# EAGLE board Clock_version_2.2 (EAGLE 9.6.2)
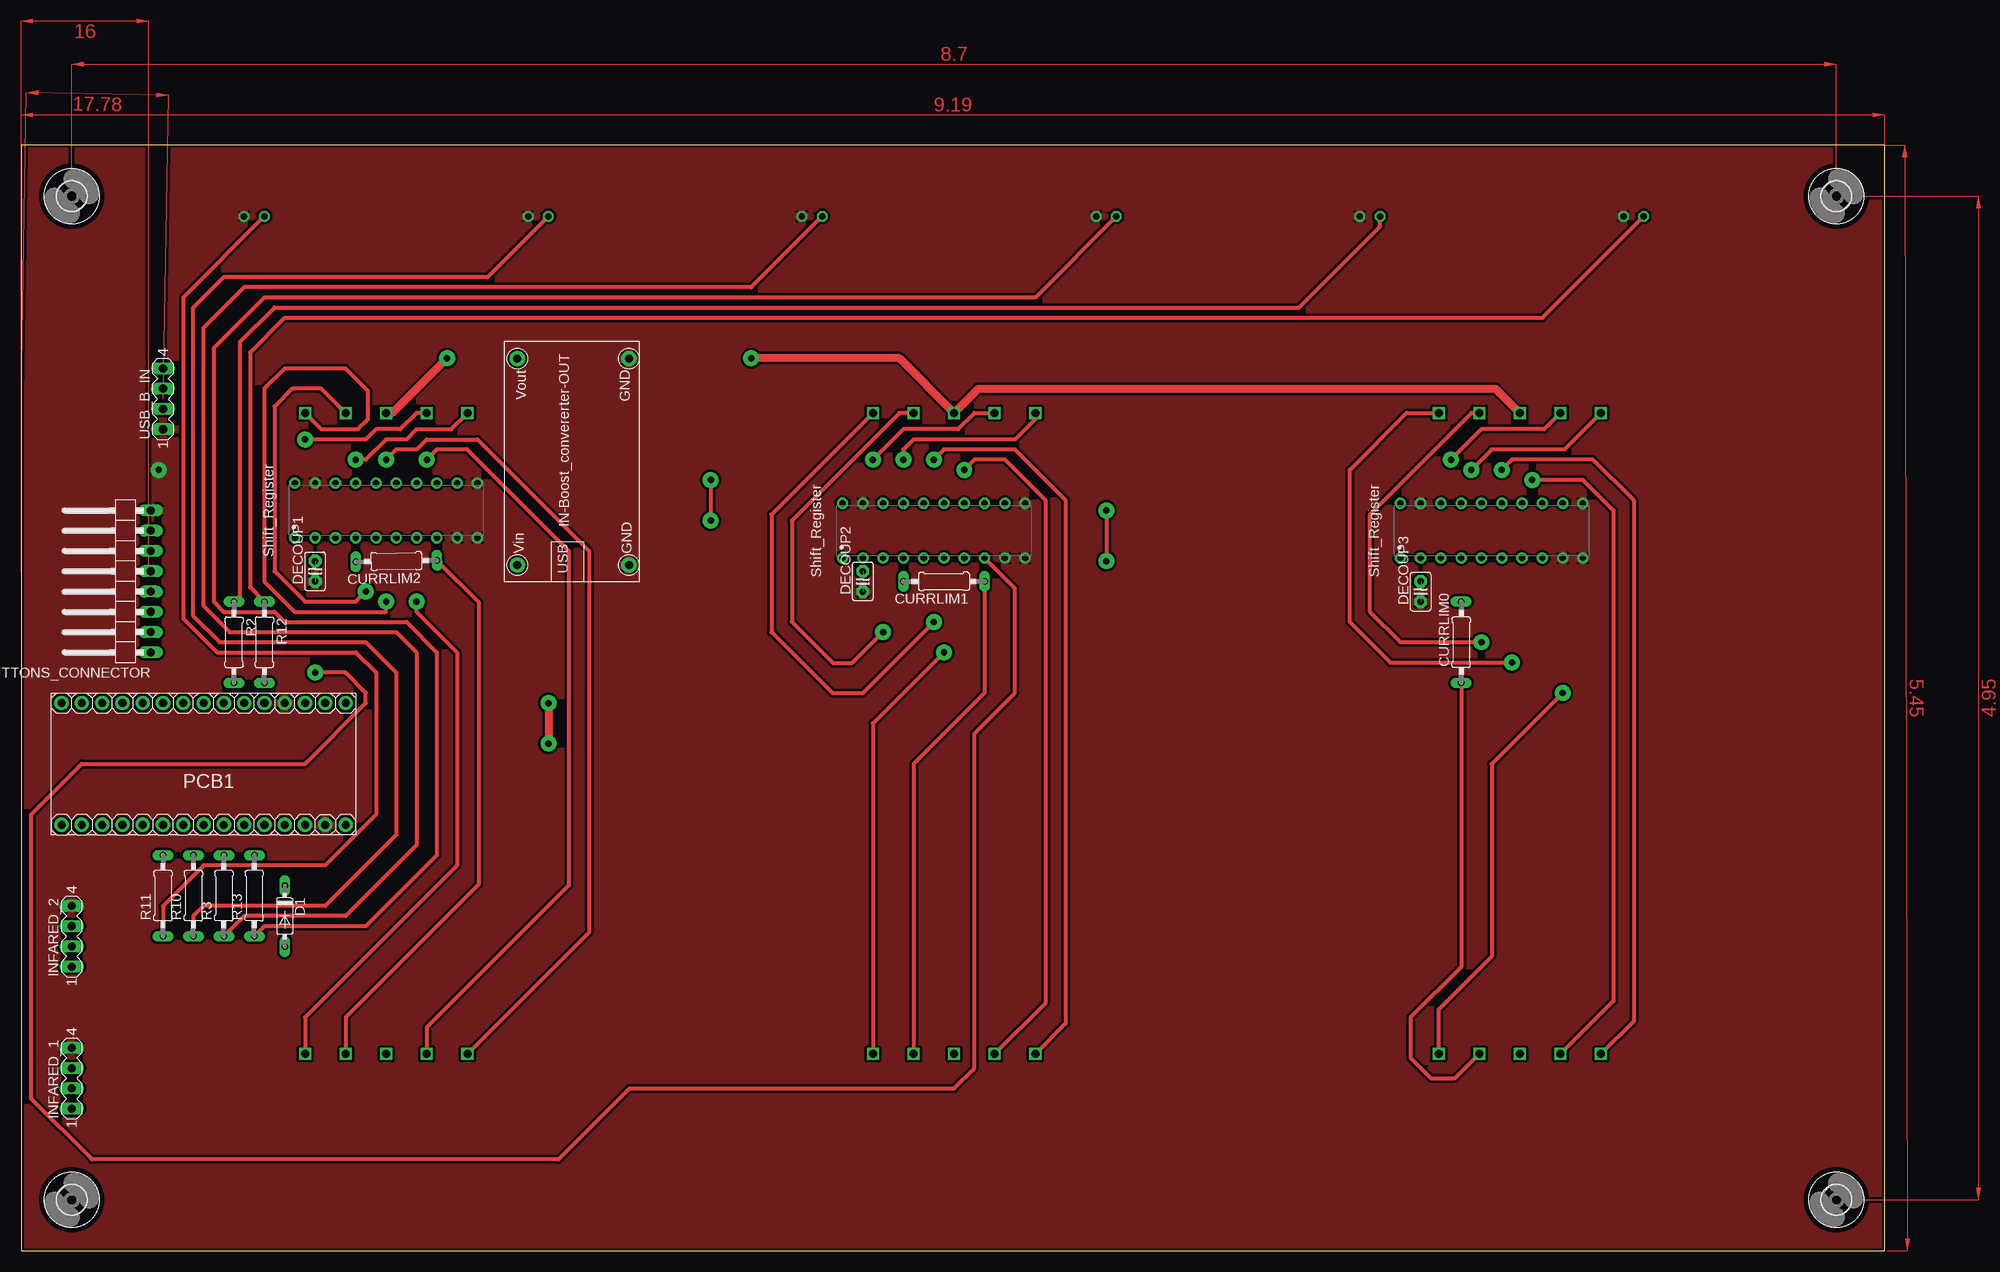
[diagram p0: board, top side]
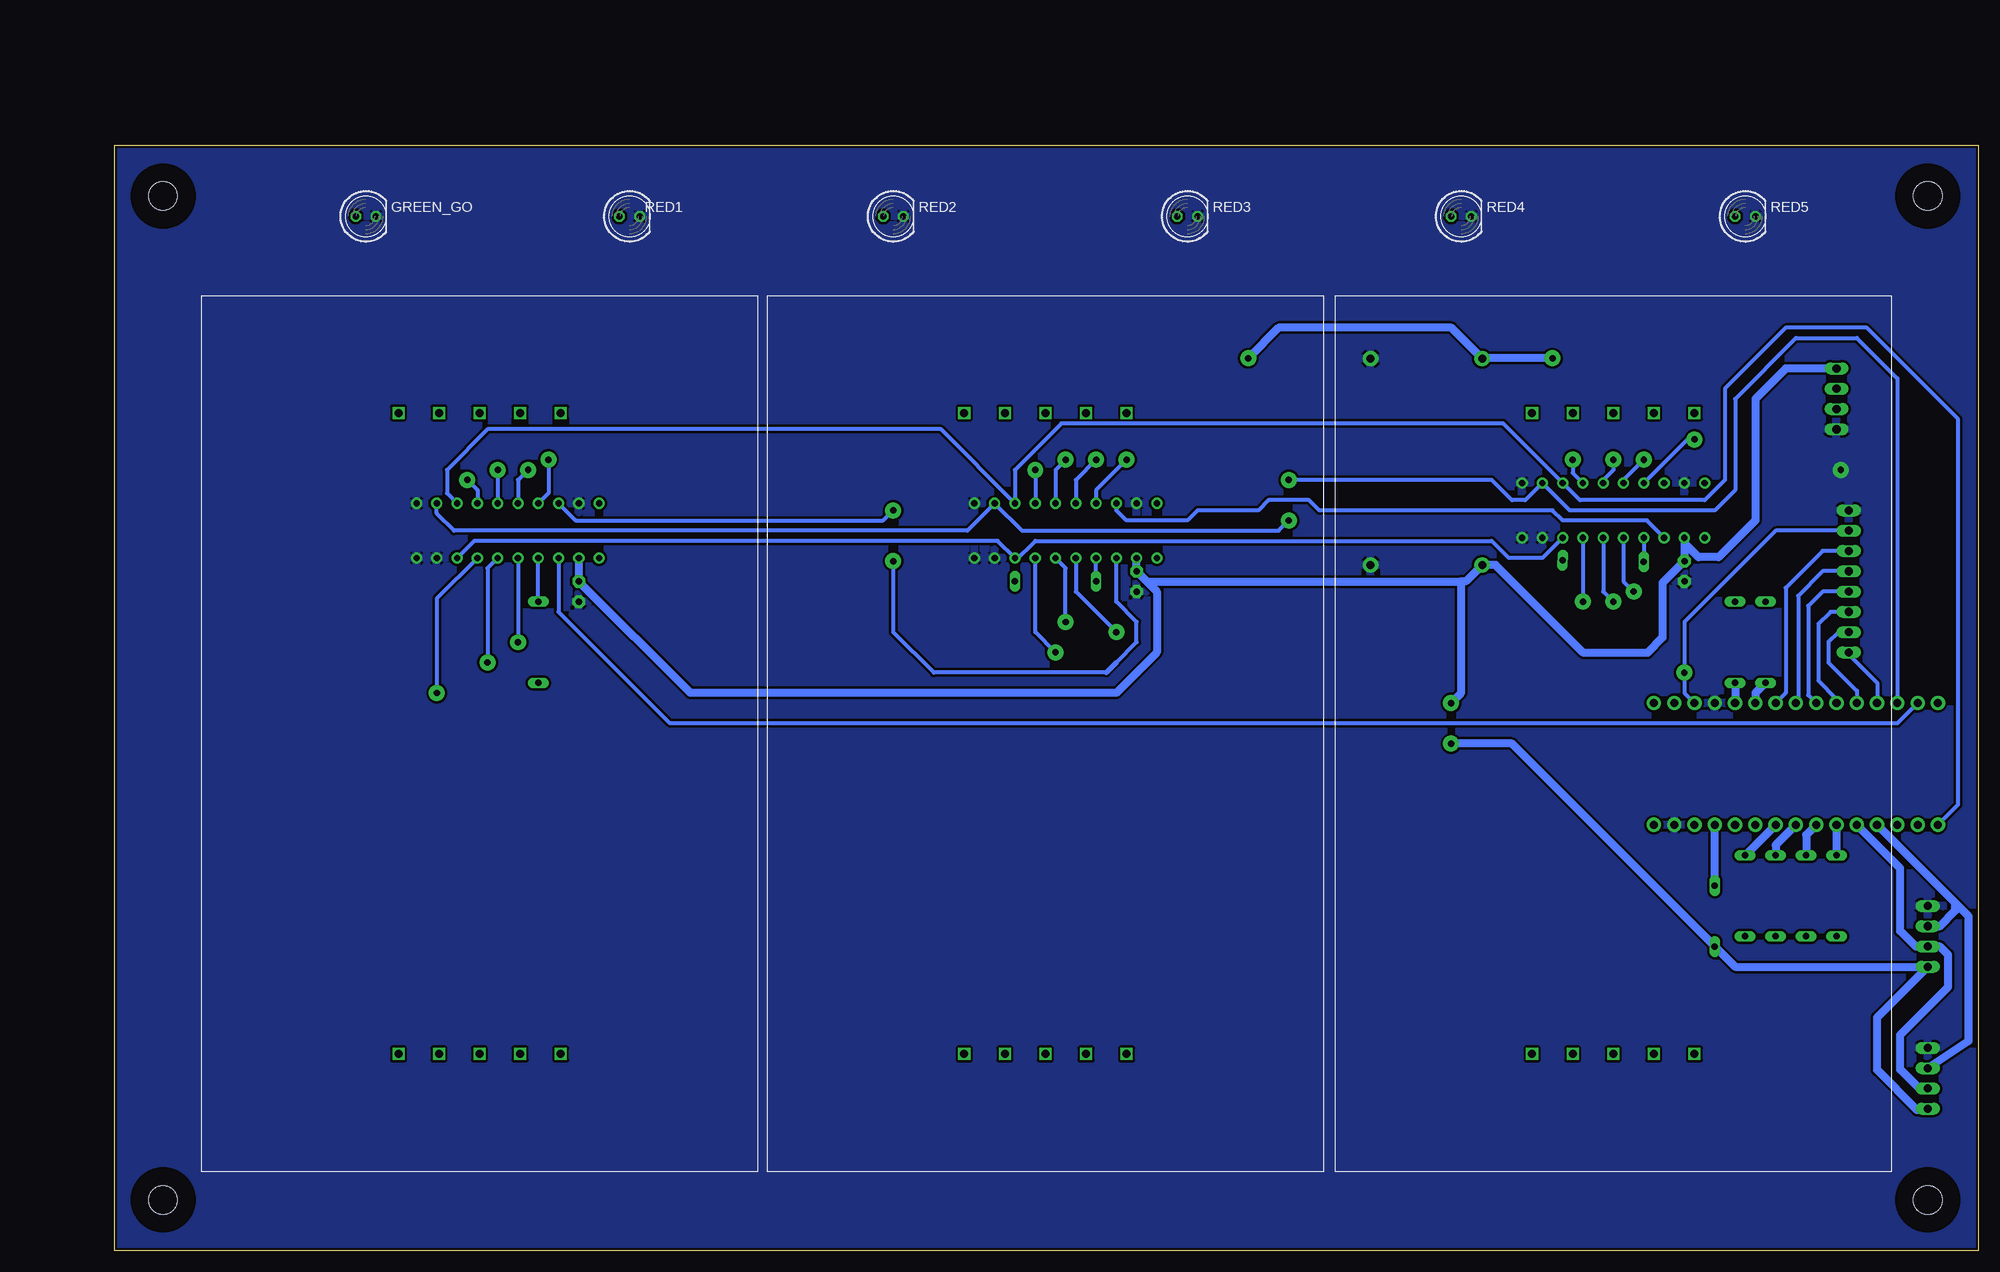
[diagram p1: board, bottom side, seen from below]

Size 233.35 x 138.42 mm. Coordinates in mm from the lower left corner, seen from the top.
Outline: 0,0 233.35,0 233.35,138.42 0,138.42 0,0
Copper layers (1*16): Top 0.035mm / dielectric 1.5mm / Bottom 0.035mm
Design rules "DRC_Advanced *": minimum track width 12mil, minimum drill 0.3mm, track to track 12mil, track to pad 12mil, pad to pad 12mil, via to via 12mil, smd to smd 6mil, copper to edge 12mil, drill to drill 12mil, minimum pad ring 10mil, minimum via ring 8mil, stop-mask expansion 4mil, vias tented up to drill 0mil, thermal gap 12mil

## Footprints (pad centres in the part's own frame; a part is rotated, then mirrored left to right if it is on the bottom)
1X08/90 = drill 1.016 long: 1 -8.89,-3.81; 2 -6.35,-3.81; 3 -3.81,-3.81; 4 -1.27,-3.81; 5 1.27,-3.81; 6 3.81,-3.81; 7 6.35,-3.81; 8 8.89,-3.81
0207/10 = drill 0.813 long: 1 -5.08,0; 2 5.08,0
DO35-7 = drill 0.813 long: A 3.81,0; C -3.81,0
C2.5-2 = drill 0.813 pad 1.6 octagon: 1 -1.27,0; 2 1.27,0
LED5MM = drill 0.813 octagon: A -1.27,0; K 1.27,0
MA04-1 = drill 1.016 long: 1 -3.81,0; 2 -1.27,0; 3 1.27,0; 4 3.81,0
7SEG_LED = drill 1 square: A 5.08,40.132; B 10.16,40.132; C 10.16,-40.132; CA 0,40.132; COM 0,-40.132; D -5.08,-40.132; DP 5.08,-40.132; E -10.16,-40.132; F -10.16,40.132; G -5.08,40.132
ARDUINO_NANO_SMOL = drill 1.016 pad 1.778: 3V3 -13.97,-7.62; 5V 11.43,-7.62; A0 -8.89,-7.62; A1 -6.35,-7.62; A2 -3.81,-7.62; A3 -1.27,-7.62; A4 1.27,-7.62; A5 3.81,-7.62; A6 6.35,-7.62; A7 8.89,-7.62; D2 8.89,7.62; D3 6.35,7.62; D4 3.81,7.62; D5 1.27,7.62; D6 -1.27,7.62; D7 -3.81,7.62; D8 -6.35,7.62; D9 -8.89,7.62; D10 -11.43,7.62; D11 -13.97,7.62; D12 -16.51,7.62; D13 -16.51,-7.62; GND 11.43,7.62; GND@2 16.51,-7.62; REF -11.43,-7.62; RESET 13.97,7.62; RESET@2 13.97,-7.62; RX0 16.51,7.62; TX1 19.05,7.62; VIN 19.05,-7.62
SHIFT_REGISTER = drill 0.788 pad 1.388: 1 -3.429,11.43; 2 -3.429,8.89; 3 -3.429,6.35; 4 -3.429,3.81; 5 -3.429,1.27; 6 -3.429,-1.27; 7 -3.429,-3.81; 8 -3.429,-6.35; 9 -3.429,-8.89; 10 -3.429,-11.43; 11 3.429,-11.43; 12 3.429,-8.89; 13 3.429,-6.35; 14 3.429,-3.81; 15 3.429,-1.27; 16 3.429,1.27; 17 3.429,3.81; 18 3.429,6.35; 19 3.429,8.89; 20 3.429,11.43
3,6 = hole 3.6: 0,0
BOOST_CONV = drill 1 pad 1.93: P$1 2.05,1.35; P$2 2.05,15.32; P$3 27.9,15.32; P$4 27.9,1.35

## Placement (x,y rotation side)
BUTTONS_CONNECTOR  [1X08/90]  12.43,83.82 90 top
CURRLIM0  270  [0207/10]  180.34,76.2 90 top
CURRLIM1  270  [0207/10]  115.57,83.82 180 top
CURRLIM2  270  [0207/10]  46.99,86.36 181 top
D1  1N4148DO35-7  [DO35-7]  33.02,41.91 270 top
DECOUP1  0.1uF  [C2.5-2]  36.83,85.09 90 top
DECOUP2  0.1uF  [C2.5-2]  105.41,83.82 90 top
DECOUP3  0.1uF  [C2.5-2]  175.26,82.55 90 top
GREEN_GO  [LED5MM]  201.93,129.54 0 bottom
INFARED_1  [MA04-1]  6.35,21.59 90 top
INFARED_2  [MA04-1]  6.35,39.37 90 top
MINUTES  7SEG_LED_A-3001SR  [7SEG_LED]  187.69,64.77 0 bottom
PCB1  ARDUINO_NANO_NOI2CSMOL  [ARDUINO_NANO_SMOL]  21.59,60.96 0 top
R2  270  [0207/10]  26.67,76.2 270 top
R3  270  [0207/10]  25.4,44.45 90 top
R10  270  [0207/10]  21.59,44.45 90 top
R11  270  [0207/10]  17.78,44.45 90 top
R12  270  [0207/10]  30.48,76.2 270 top
R13  270  [0207/10]  29.21,44.45 90 top
RED1  [LED5MM]  168.91,129.54 0 bottom
RED2  [LED5MM]  135.89,129.54 0 bottom
RED3  [LED5MM]  99.06,129.54 0 bottom
RED4  [LED5MM]  64.77,129.54 0 bottom
RED5  [LED5MM]  29.21,129.54 0 bottom
SECONDS_ONES  7SEG_LED_A-3001SR  [7SEG_LED]  45.74,64.77 0 bottom
SECONDS_TENS  7SEG_LED_A-3001SR  [7SEG_LED]  116.84,64.77 0 bottom
SP0  SHIFT_REGISTER_TPIC6C595  [SHIFT_REGISTER]  184.15,90.17 90 top
SP1  SHIFT_REGISTER_TPIC6C595  [SHIFT_REGISTER]  114.3,90.17 90 top
SP2  SHIFT_REGISTER_TPIC6C595  [SHIFT_REGISTER]  45.72,92.71 90 top
U$1  [3,6]  6.35,132.08 0 top
U$4  BOOST_CONV  [BOOST_CONV]  77.47,83.82 90 top
U$6  [3,6]  6.35,6.35 0 top
U$7  [3,6]  227.33,132.08 0 top
U$8  [3,6]  227.33,6.35 0 top
USB_B_IN  [MA04-1]  17.78,106.68 90 top

## Library data of the parts
BUTTONS_CONNECTOR = pinhead
CURRLIM0 CURRLIM1 CURRLIM2 R2 R3 R10-R13 = BJH_LIB; SPICEPREFIX: R
D1 = diode
DECOUP1-DECOUP3 = capacitor-wima
GREEN_GO RED1-RED5 = led
INFARED_1 INFARED_2 USB_B_IN = con-lstb; OC_FARNELL: unknown; OC_NEWARK: unknown
MINUTES SECONDS_ONES SECONDS_TENS SP0 SP1 SP2 = ARC_Clock
PCB1 = ElcPartsLibrary
U$1 U$6-U$8 = holes
U$4 = BJH_LIB

## Nets
1MIN_IN: BUTTONS_CONNECTOR.2 PCB1.D8
5V: D1.A DECOUP1.2 DECOUP2.2 DECOUP3.2 INFARED_1.1 INFARED_2.1 SP0.2 SP1.2 SP2.2 U$4.P$2 USB_B_IN.4
12V: MINUTES.CA SECONDS_ONES.CA SECONDS_TENS.CA U$4.P$3
30S_IN: BUTTONS_CONNECTOR.3 PCB1.D7
A0: MINUTES.A SP0.5
A1: SECONDS_TENS.A SP1.5
A2: SECONDS_ONES.A SP2.5
B0: MINUTES.B SP0.6
B1: SECONDS_TENS.B SP1.6
B2: SECONDS_ONES.B SP2.6
C0: MINUTES.C SP0.7
C1: SECONDS_TENS.C SP1.7
C2: SECONDS_ONES.C SP2.7
D0: MINUTES.D SP0.14
D1: SECONDS_TENS.D SP1.14
D2: SECONDS_ONES.D SP2.14
D+: USB_B_IN.2
D-: USB_B_IN.3
DP0: CURRLIM0.2 SP0.4
DP1: CURRLIM1.2 SP1.4
DP2: CURRLIM2.2 SP2.4
E0: MINUTES.E SP0.15
E1: SECONDS_TENS.E SP1.15
E2: SECONDS_ONES.E SP2.15
F0: MINUTES.F SP0.16
F1: SECONDS_TENS.F SP1.16
F2: SECONDS_ONES.F SP2.16
G0: MINUTES.G SP0.17
G1: SECONDS_TENS.G SP1.17
G2: SECONDS_ONES.G SP2.17
GND: BUTTONS_CONNECTOR.8 DECOUP1.1 DECOUP2.1 DECOUP3.1 GREEN_GO.K INFARED_1.4 INFARED_2.4 PCB1.GND PCB1.GND@2 RED1.K RED2.K RED3.K RED4.K RED5.K SP0.9 SP0.10 SP0.11 SP0.19 SP1.9 SP1.10 SP1.11 SP1.19 SP2.9 SP2.10 SP2.11 SP2.19 U$4.P$1 U$4.P$4 USB_B_IN.1
GREEN: PCB1.D2 R12.2
IF_IN: INFARED_1.3 INFARED_2.3 PCB1.A0
IF_OUT: INFARED_1.2 INFARED_2.2 PCB1.A1
MISC: BUTTONS_CONNECTOR.1 PCB1.D9
N$1: PCB1.D11 SP0.3
N$2: D1.C PCB1.5V
N$3: CURRLIM0.1 MINUTES.DP
N$4: CURRLIM1.1 SECONDS_TENS.DP
N$5: CURRLIM2.1 SECONDS_ONES.DP
N$6: SP0.18 SP1.3
N$7: SP1.18 SP2.3
N$8: PCB1.D13 SP0.13 SP1.13 SP2.13
N$9: PCB1.RESET@2
N$11: R2.1 RED1.A
N$12: R13.1 RED2.A
N$13: R3.1 RED3.A
N$14: R10.1 RED4.A
N$15: R11.1 RED5.A
N$16: GREEN_GO.A R12.1
N$19: PCB1.A5 R13.2
N$20: PCB1.A4 R3.2
N$21: PCB1.A3 R10.2
N$22: PCB1.A2 R11.2
N$36: SECONDS_ONES.COM
N$40: SECONDS_TENS.COM
N$44: MINUTES.COM
PAUSE_IN: BUTTONS_CONNECTOR.5 PCB1.D5
REDONE: PCB1.D3 R2.2
RESUME_IN: BUTTONS_CONNECTOR.4 PCB1.D6
RST: BUTTONS_CONNECTOR.7 PCB1.RESET SP0.8 SP1.8 SP2.8
SS: PCB1.D10 SP0.12 SP1.12 SP2.12
START_IN: BUTTONS_CONNECTOR.6 PCB1.D4

## Tracks (layer width: path | path; a pad name or v marks a point on that pad's centre or on a via)
1MIN_IN
  Bottom 0.508: BUTTONS_CONNECTOR.2 17.51,77.47 18.78,76.2 18.78,73.66 15.24,70.12 PCB1.D8
5V  (via drill 0.8 pad 2)
  Top 1.016: v66.04,68.58 v66.04,63.5
  Bottom 1.016: 64.77,83.82 64.2,83.82 U$4.P$2 60.47,85.87 49.47,74.87 41.47,74.87 39.56,76.77 39.56,83.63 DECOUP1.2 SP2.2 36.83,88.64 35.06,86.86 32.52,86.86 27.94,91.44 27.94,106.68 24.13,110.49 USB_B_IN.4 | 64.77,83.82 104.14,83.82 DECOUP2.2 | DECOUP2.2 SP1.2 | SP0.2 DECOUP3.2 161.29,69.85 107.95,69.85 102.87,74.93 102.87,82.55 DECOUP2.2 | INFARED_1.1 6.5,17.63 7.7,17.63 12.7,22.63 12.7,29.21 INFARED_2.1 30.48,35.56 D1.A 58.42,63.5 v66.04,63.5 | v66.04,68.58 64.77,69.85 64.77,83.82
12V  (via drill 0.8 pad 2)
  Top 1.016: v53.34,111.76 46.48,104.9 SECONDS_ONES.CA | MINUTES.CA 184.64,107.95 119.89,107.95 SECONDS_TENS.CA 109.98,111.76 v91.44,111.76
  Bottom 1.016: v53.34,111.76 62.11,111.76 U$4.P$3 66,115.57 87.63,115.57 v91.44,111.76
30S_IN
  Bottom 0.508: BUTTONS_CONNECTOR.3 18.51,80.01 20.05,78.47 20.05,71.39 17.78,69.12 PCB1.D7
A0  (via drill 0.8 pad 2)
  Top 0.508: v182.88,76.2 172.72,76.2 168.91,80.01 168.91,92.2 181.61,104.9 MINUTES.A
  Bottom 0.508: SP0.5 v182.88,76.2
A1  (via drill 0.8 pad 2)
  Top 0.508: SECONDS_TENS.A 109.98,104.9 96.52,91.44 96.52,78.74 101.69,73.57 104.05,73.57 v107.95,77.47
  Bottom 0.508: SP1.5 113.03,82.55 v107.95,77.47
A2  (via drill 0.8 pad 2)
  Top 0.508: SECONDS_ONES.A 37.61,107.95 33.98,107.95 31.75,105.72 31.75,85.09 35.56,81.28 41.91,81.28 v43.18,82.55
  Bottom 0.508: SP2.5 44.45,83.82 v43.18,82.55
B0  (via drill 0.8 pad 2)
  Top 0.508: v186.69,73.66 171.45,73.66 166.37,78.74 166.37,97.79 173.48,104.9 MINUTES.B
  Bottom 0.508: SP0.6 186.69,85.47 v186.69,73.66
B1  (via drill 0.8 pad 2)
  Top 0.508: SECONDS_TENS.B 93.98,92.2 93.98,77.47 101.6,69.85 105.41,69.85 v114.3,78.74
  Bottom 0.508: v114.3,78.74 114.3,85.47 SP1.6
B2  (via drill 0.8 pad 2)
  Top 0.508: SECONDS_ONES.B 35.58,104.89 37.59,102.87 42.18,102.87 43.45,104.14 43.45,107.68 40.64,110.49 33.02,110.49 30.48,107.95 30.48,83.82 34.29,80.01 45.72,80.01 v45.72,81.28
  Bottom 0.508: SP2.6 46.99,82.55 v45.72,81.28
C0  (via drill 0.8 pad 2)
  Top 0.508: MINUTES.C 177.53,30.21 184.15,36.83 184.15,60.96 v193.04,69.85
  Bottom 0.508: SP0.7 193.04,81.66 v193.04,69.85
C1  (via drill 0.8 pad 2)
  Top 0.508: SECONDS_TENS.C 106.68,66.04 v115.57,74.93
  Bottom 0.508: SP1.7 118.11,77.47 v115.57,74.93
C2  (via drill 0.8 pad 2)
  Top 0.508: SECONDS_ONES.C 35.58,29.23 54.61,48.26 54.61,74.93 49.53,80.01 v49.53,81.28
  Bottom 0.508: SP2.7 v49.53,81.28
D0  (via drill 0.8 pad 2)
  Top 0.508: MINUTES.D 199.39,31.26 199.39,92.71 195.58,96.52 v189.23,96.52
  Bottom 0.508: v189.23,96.52 187.96,95.25 SP0.14
D1  (via drill 0.8 pad 2)
  Top 0.508: SECONDS_TENS.D 128.27,30.99 128.27,93.98 123.19,99.06 119.38,99.06 v118.11,97.79
  Bottom 0.508: v118.11,97.79 SP1.14
D2  (via drill 0.8 pad 2)
  Top 0.508: SECONDS_ONES.D 50.82,27.96 68.58,45.72 68.58,87.63 55.88,100.33 52.07,100.33 v50.8,99.06
  Bottom 0.508: v50.8,99.06 50.8,97.41 SP2.14
DP0
  Bottom 0.508: CURRLIM0.2 SP0.4
DP1
  Bottom 0.508: CURRLIM1.2 SP1.4
DP2
  Bottom 0.508: SP2.4 CURRLIM2.2
E0  (via drill 0.8 pad 2)
  Top 0.508: MINUTES.E 201.93,28.72 201.93,93.98 196.85,99.06 186.69,99.06 v185.42,97.79
  Bottom 0.508: v185.42,97.79 SP0.15
E1  (via drill 0.8 pad 2)
  Top 0.508: SECONDS_TENS.E 130.81,28.45 130.81,93.98 124.46,100.33 115.57,100.33 v114.3,99.06
  Bottom 0.508: v114.3,99.06 115.57,97.79 SP1.15
E2  (via drill 0.8 pad 2)
  Top 0.508: v45.72,99.06 46.99,100.33 49.53,100.33 50.8,101.6 57.15,101.6 71.12,87.63 71.12,39.86 SECONDS_ONES.E
  Bottom 0.508: v45.72,99.06 45.72,97.79 46.99,96.52 SP2.15
F0  (via drill 0.8 pad 2)
  Top 0.508: MINUTES.F 193.28,100.33 184.15,100.33 v181.61,97.79
  Bottom 0.508: v181.61,97.79 182.88,96.52 SP0.16
F1  (via drill 0.8 pad 2)
  Top 0.508: SECONDS_TENS.F 127,104.14 124.46,101.6 111.76,101.6 110.49,100.33 v110.49,99.06
  Bottom 0.508: v110.49,99.06 113.03,96.52 SP1.16
F2  (via drill 0.8 pad 2)
  Top 0.508: v41.91,99.06 43.18,99.06 45.72,101.6 48.26,101.6 49.53,102.87 53.86,102.87 SECONDS_ONES.F
  Bottom 0.508: v41.91,99.06 44.45,96.52 SP2.16
G0  (via drill 0.8 pad 2)
  Top 0.508: MINUTES.G 190.74,102.87 182.88,102.87 v179.07,99.06
  Bottom 0.508: SP0.17 179.07,94.87 v179.07,99.06
G1  (via drill 0.8 pad 2)
  Top 0.508: SECONDS_TENS.G 119.38,104.9 117.35,102.87 110.49,102.87 v106.68,99.06
  Bottom 0.508: v106.68,99.06 110.49,95.25 110.49,93.98 SP1.17
G2  (via drill 0.8 pad 2)
  Top 0.508: SECONDS_ONES.G 49.53,104.9 47.5,102.87 44.45,102.87 43.18,101.6 v35.56,101.6
  Bottom 0.508: v35.56,101.6 36.45,101.6 SP2.17
GND  (via drill 0.8 pad 2)
  other vias: 17.24,97.79
  pour Top: -3.81,143.51 234.95,143.51 236.22,142.24 236.22,-1.27 232.41,-5.08 -3.68,-5.08 -8.64,138.68
  pour Bottom: -3.81,144.78 232.41,144.78 238.76,138.43 238.76,-1.27 231.14,-8.89 0,-8.89 -7.62,-1.27 -7.62,140.97
GREEN
  Bottom 1.016: R12.2 PCB1.D2
IF_IN
  Bottom 1.016: INFARED_2.3 4.85,40.64 2.9,42.59 2.9,43.54 | PCB1.A0 2.9,43.54 | 2.9,43.54 1.27,41.91 1.27,26.25 INFARED_1.3
IF_OUT
  Bottom 1.016: PCB1.A1 9.8,47.9 9.8,40.05 7.85,38.1 INFARED_2.2 4.85,38.1 3.81,37.06 3.81,33.02 9.8,27.03 9.8,22.71 7.42,20.32 INFARED_1.2
MISC
  Bottom 0.508: BUTTONS_CONNECTOR.1 16.24,74.66 12.7,71.12 PCB1.D9
N$1
  Bottom 0.508: SP0.3 177.8,80.01 163.83,66.04 10.16,66.04 PCB1.D11
N$2
  Bottom 1.016: D1.C PCB1.5V
N$3
  Top 0.508: CURRLIM0.1 180.34,35.56 173.99,29.21 173.99,24.13 176.53,21.59 179.56,21.59 MINUTES.DP
N$4
  Top 0.508: CURRLIM1.1 120.65,69.85 111.76,60.96 SECONDS_TENS.DP
N$5
  Top 0.508: SECONDS_ONES.DP 40.66,29.23 57.31,45.88 57.31,81.21 CURRLIM2.1
N$6  (via drill 0.8 pad 2)
  Top 0.508: v135.89,92.71 v135.89,86.36
  Bottom 0.508: 107.95,73.66 105.41,76.2 105.41,78.74 107.95,81.28 SP1.3 | 109.22,72.39 130.81,72.39 135.89,77.47 v135.89,86.36 | SP0.18 175.64,91.44 137.16,91.44 v135.89,92.71
  Bottom 0.61: 107.95,73.66 109.22,72.39
N$7
  Bottom 0.508: SP1.18 107.95,92.71 106.68,91.44 99.06,91.44 97.79,92.71 90.17,92.71 88.9,93.98 83.82,93.98 82.55,92.71 53.34,92.71 52.07,91.44 41.53,91.44 SP2.3
N$8
  Bottom 0.508: SP0.13 191.77,94.87 191.77,97.79 186.69,102.87 129.92,102.87 SP1.13 120.65,97.79 114.85,103.59 59.52,103.59 SP2.13 49.91,93.98 34.29,93.98 31.75,96.52 31.75,107.95 24.13,115.57 13.97,115.57 2.54,104.14 2.54,55.88 PCB1.D13
N$11
  Top 0.508: R2.1 27.4,82.01 27.4,113.76 31.75,118.11 160.02,118.11 170.18,128.27 RED1.A
N$12
  Top 0.508: RED2.A 127,119.38 30.48,119.38 24.13,113.03 24.13,81.28 25.4,80.01 31.75,80.01 33.02,78.74 48.26,78.74 52.07,74.93 52.07,49.53 43.18,40.64 30.48,40.64 R13.1
N$13
  Top 0.508: RED3.A 91.44,120.65 27.94,120.65 22.86,115.57 22.86,80.74 26.13,77.47 46.99,77.47 49.53,74.93 49.53,50.8 40.64,41.91 27.94,41.91 R3.1
N$14
  Top 0.508: RED4.A 58.42,121.92 25.4,121.92 21.59,118.11 21.59,79.47 24.86,76.2 43.18,76.2 46.99,72.39 46.99,52.07 38.1,43.18 22.86,43.18 21.59,41.91 R10.1
N$15
  Top 0.508: RED5.A 20.32,119.38 20.32,79.2 24.59,74.93 41.91,74.93 44.45,72.39 44.45,54.61 38.1,48.26 22.86,48.26 17.78,43.18 R11.1
N$16
  Top 0.508: R12.1 28.67,83.09 28.67,112.49 33.02,116.84 190.5,116.84 GREEN_GO.A
N$19
  Bottom 1.016: R13.2 PCB1.A5
N$20
  Bottom 1.016: PCB1.A4 25.4,50.8 R3.2
N$21
  Bottom 1.016: PCB1.A3 21.59,52.07 R10.2
N$22
  Bottom 1.016: PCB1.A2 R11.2
PAUSE_IN
  Bottom 0.508: BUTTONS_CONNECTOR.5 19.51,85.09 22.59,82.01 22.59,68.85 PCB1.D5
REDONE
  Bottom 1.016: R2.2 27.94,69.85 PCB1.D3
RESUME_IN
  Bottom 0.508: BUTTONS_CONNECTOR.4 19.51,82.55 21.32,80.74 21.32,69.58 PCB1.D6
RST  (via drill 0.8 pad 2)
  Top 0.508: SP1.8 124.46,82.93 124.46,69.85 119.38,64.77 119.38,22.86 116.84,20.32 76.2,20.32 67.31,11.43 8.89,11.43 1.27,19.05 1.27,54.61 7.62,60.96 35.56,60.96 43.18,68.58 43.18,69.85 40.64,72.39 v36.83,72.39
  Bottom 0.508: SP2.8 54.56,86.79 58.85,86.79 60.96,88.9 118.11,88.9 120.65,86.36 120.47,86.56 SP1.8 122.81,88.9 188.34,88.9 SP0.8 | PCB1.RESET 36.83,69.85 v36.83,72.39 36.83,78.74 25.4,90.17 BUTTONS_CONNECTOR.7
SS  (via drill 0.8 pad 2)
  Top 0.508: v86.36,96.52 v86.36,91.44
  Bottom 0.508: SP0.12 193.04,92.33 190.88,90.17 126.62,90.17 SP1.12 119.76,90.17 87.63,90.17 v86.36,91.44 | v86.36,96.52 60.96,96.52 58.42,93.98 56.77,93.98 SP2.12 51.18,92.71 33.02,92.71 30.48,95.25 30.48,106.68 22.86,114.3 15.24,114.3 10.16,109.22 PCB1.D10
START_IN
  Bottom 0.508: BUTTONS_CONNECTOR.6 19.51,87.63 24.13,83.01 24.13,69.85 PCB1.D4
(copper drawn outside any net)
  shapes: Top area x6